# Altium PCB cy2018brush-driver_final.PcbDoc
Units mil, origin at the board's own origin, x right, y up, seen from the top; angles counter-clockwise.
Board outline 1980.48 x 1695.03 mil, 2 copper layers (Top Layer, Bottom Layer); 93 components, 101 nets, 336 pads, 123 vias.
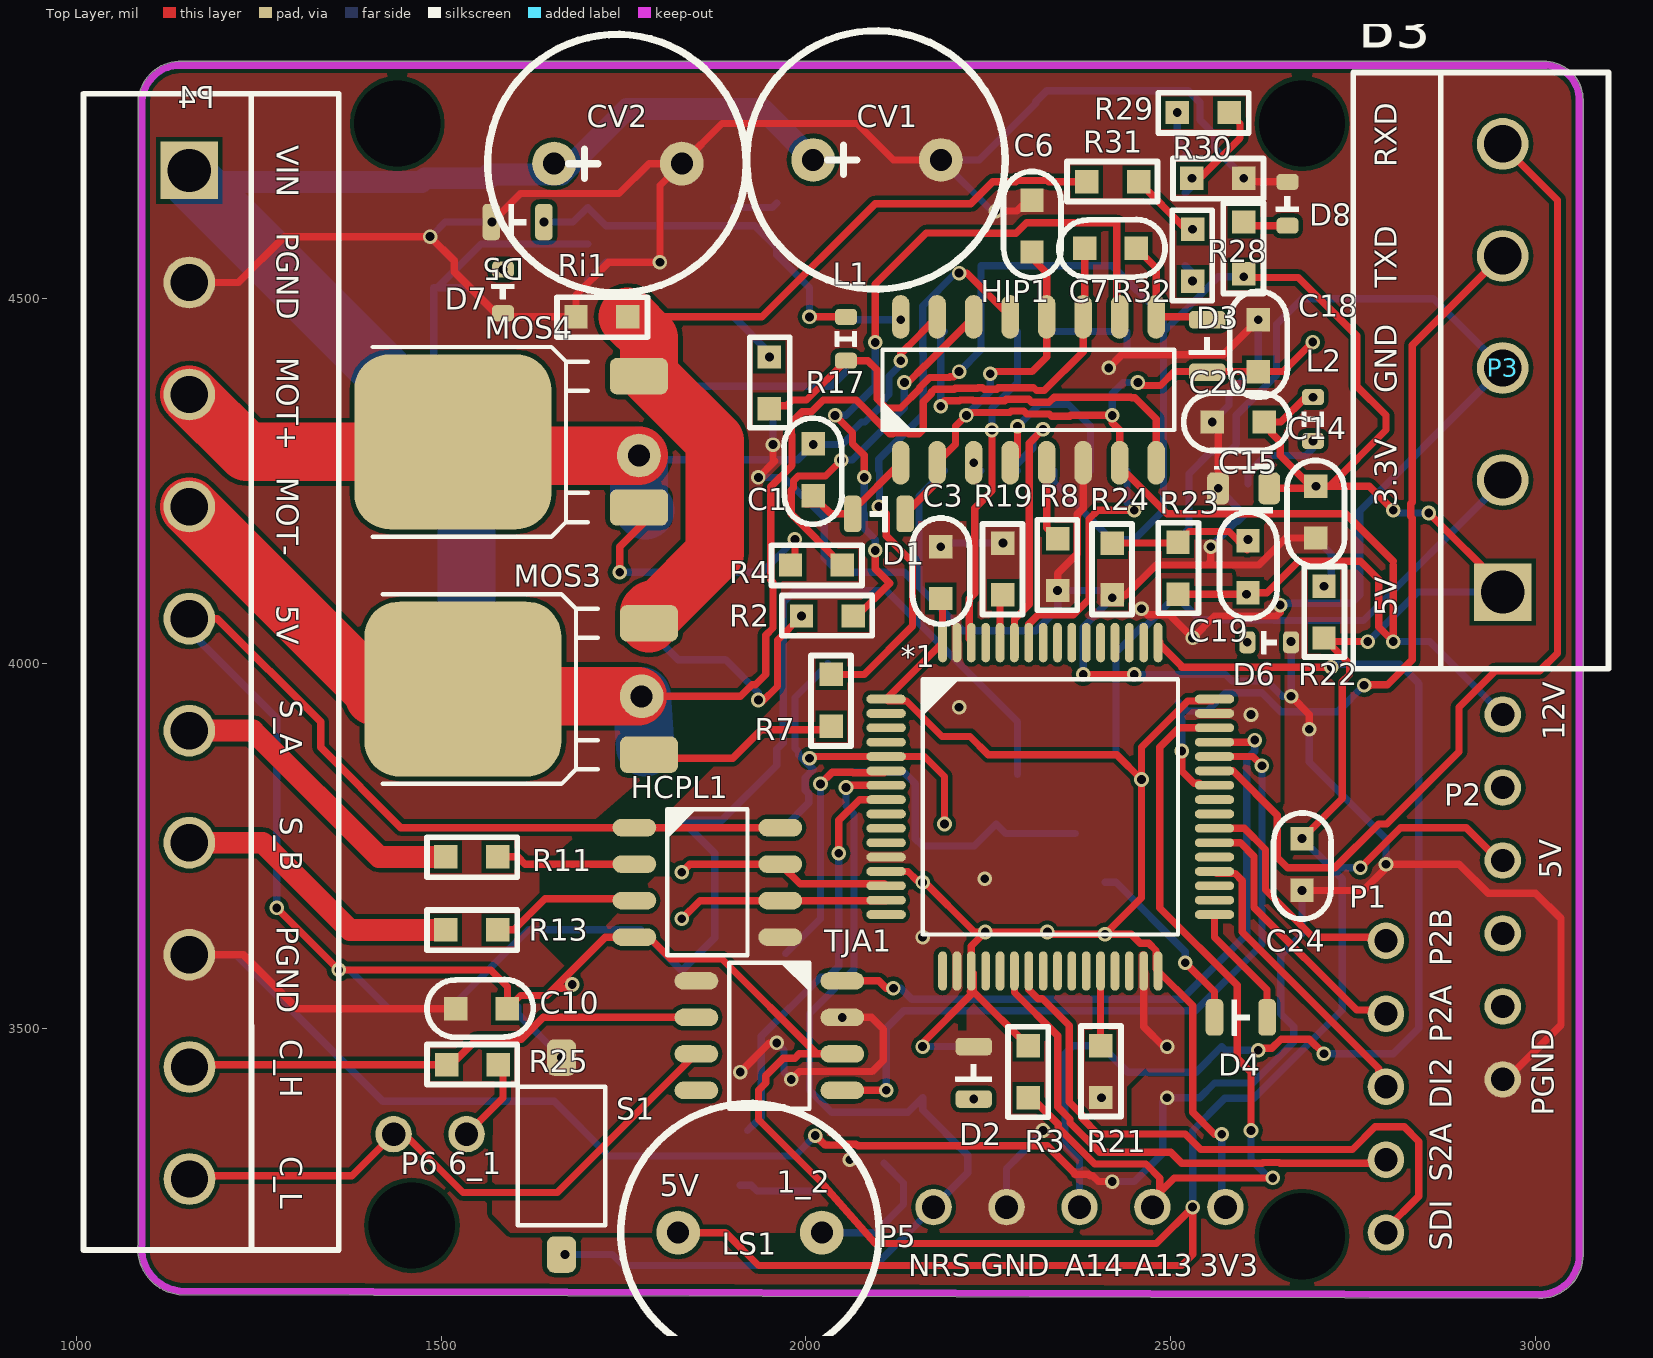
[diagram p0: Top Layer view]
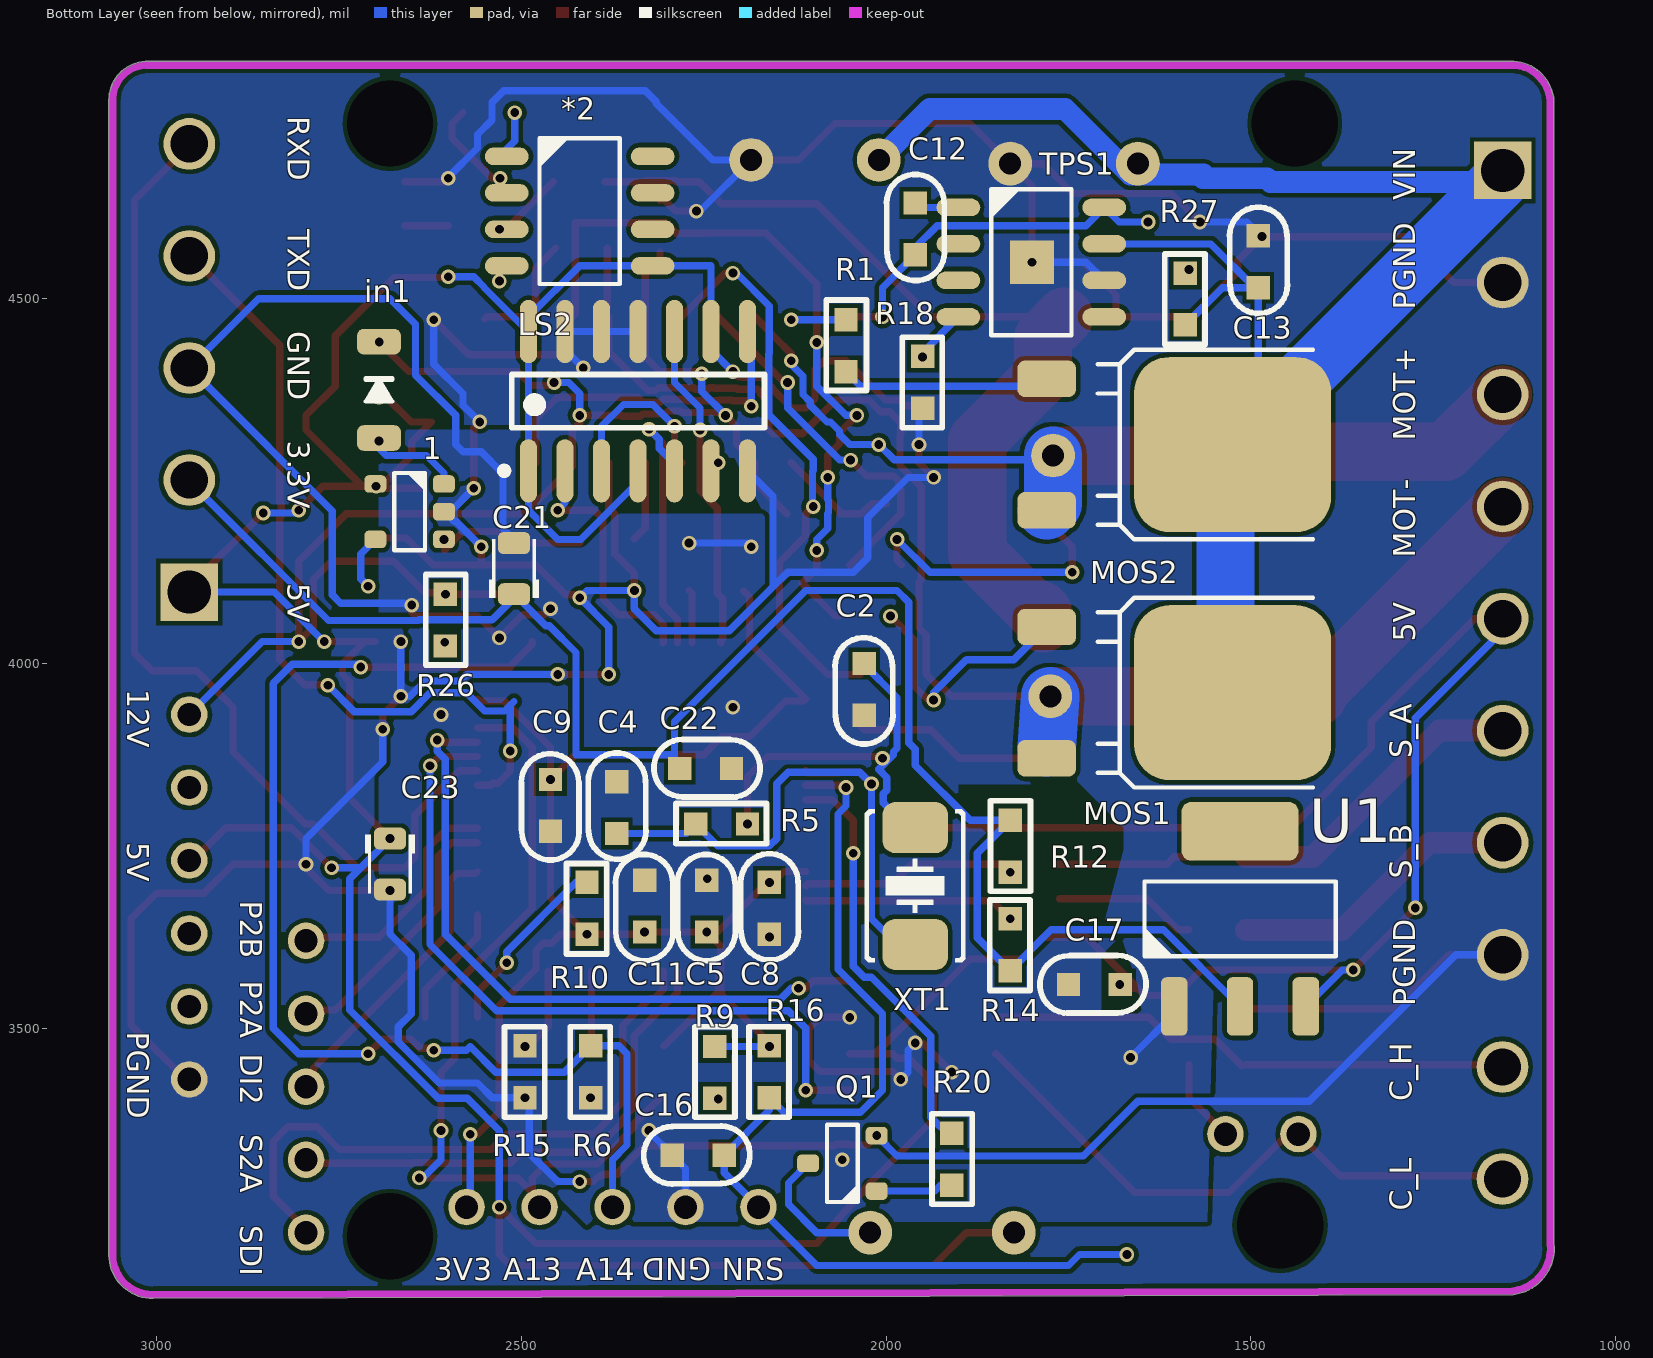
[diagram p1: Bottom Layer view, seen from below]
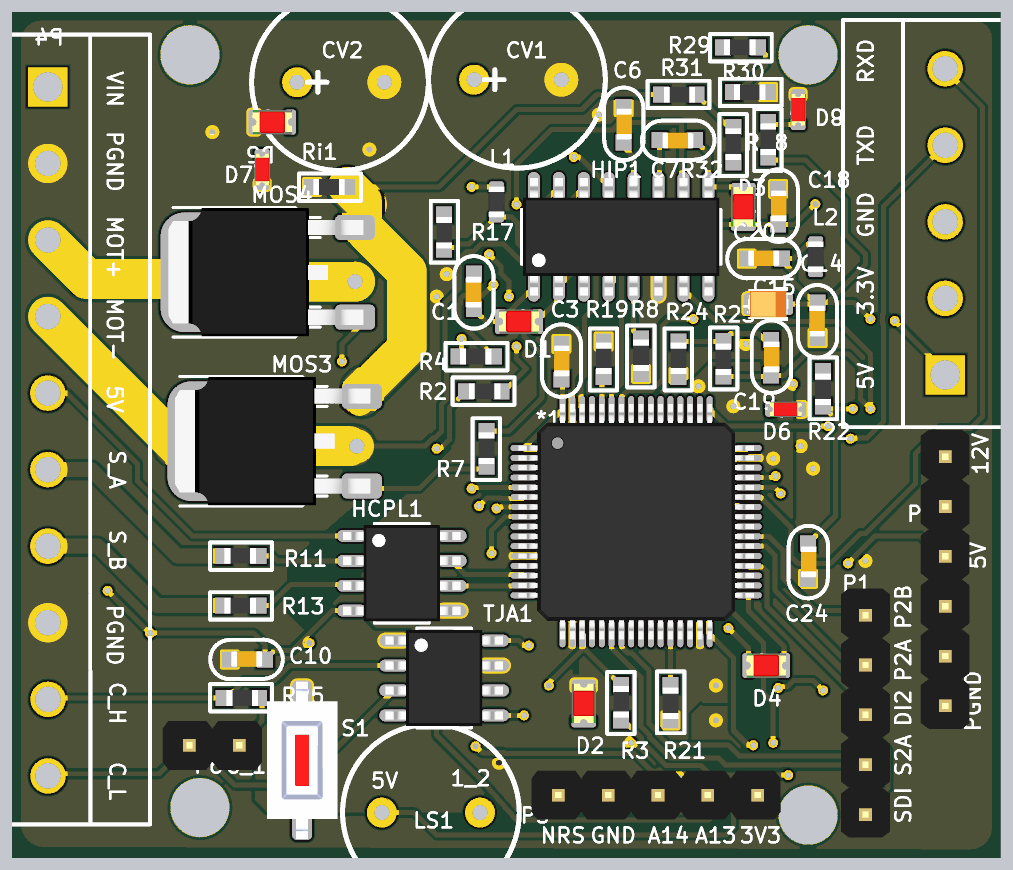
[diagram p2: 3D render of the assembled board from above, using the file's embedded part models]
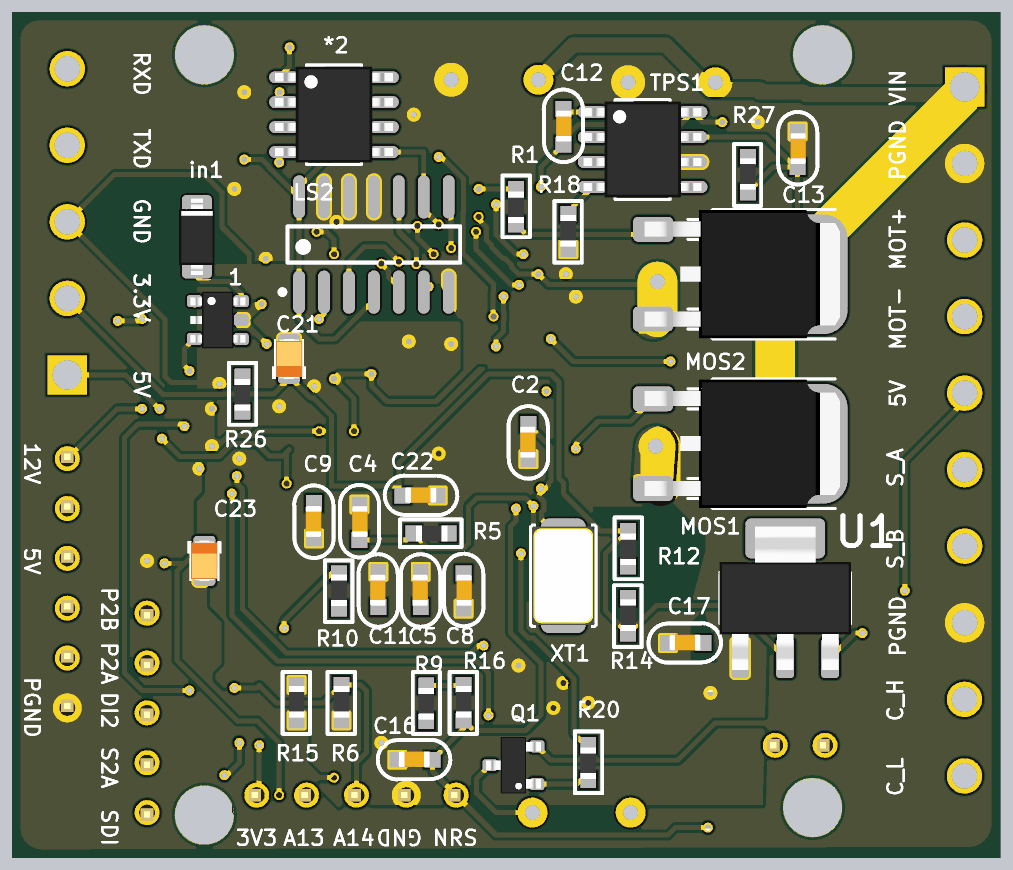
[diagram p3: 3D render of the assembled board from below, using the file's embedded part models]

## Layer stack, top to bottom
Top Solder: solder mask 0.4, Solder Resist, Dk 3.5
Top Layer: signal copper 1.4
Dielectric 1: dielectric 12.6, FR-4, Dk 4.8
Bottom Layer: signal copper 1.4
Bottom Solder: solder mask 0.4, Solder Resist, Dk 3.5

## Board outline
1084.98,3205.17 1084.98,4764.88 cw(c1142.5,4767.5) 1084.98,4770.12 1084.98,4775 cw(c1090,4775) 1085.86,4777.83 cw(c1142.5,4767.5) 1139.76,4825.01 cw(c1140,4820) 1140,4825.02 3015,4825.02 cw(c3015,4820) 3015.26,4825.01 cw(c3012.5,4772.5) 3065.08,4772.5 cw(c3012.5,4772.5) 3065.01,4769.87 3065.01,3189.33 cw(c3060,3189.33) 3065.01,3189.3 cw(c3005.34,3189.66) 3004.97,3129.99 cw(c3005,3135) 3004.96,3129.99 3004.99,3129.99 3004.96,3129.99 1141.18,3135.06 cw(c1141.2,3140.07) 1140.61,3135.09 cw(c1148,3198.08)

## Design rules (kind name [scope] priority, off if disabled: settings)
Clearance [All] p1: gap=6 ignorepadtopadclearanceinfootprint=TRUE
PolygonConnect [All] p1: connectstyle=Direct reliefconductorwidth=10 reliefentries=4 polygonreliefangle="90 Angle" airgapwidth=10
RoutingVias [All] p1: holewidth=28 width=50 viastyle="Through Hole" minholewidth=28 minwidth=50 maxholewidth=28 maxwidth=50
SilkToSilkClearance [All] p1 off: silktosilkclearance=10
SolderMaskExpansion [All] p1: expansion=4
Width [All] p1: maxlimit=100 minlimit=10 preferedwidth=10 minimp=50.000000 maximp=50.000000 favimp=50.000000
29 further rules are at their usual default settings.

## Classes and differential pairs
component class Sheet1: 1 *1 C1 C2 C3 C4 C5 C6 C7 C8 C9 C10 C11 C12 C13 C14 C15 C16 C17 C18 C19 C20 C21 C22 C23 C24 CV1 CV2 D1 D2 D3 D4 D5 D6 D7 D8 HCPL1 HIP1 in1 L1 L2 LS1 LS2 MOS1 MOS2 MOS3 MOS4 P1 P2 P3 P4 P5 P6 Q1 R1 R2 R3 R4 R5 R6 R7 R8 R9 R10 R11 R12 R13 R14 R15 R16 R17 R18 R19 R20 R21 R22 R23 R24 R25 R26 R27 R28 Ri1 S1 TJA1 TPS1 U1 XT1
component class 放大电路: *2 R29 R30 R31 R32

## Components (designator, comment, footprint, x,y, rotation, side; value= is the part's Value field where it differs from the comment)
1 "LM27313" SOT23-5 2653,4208 r0 bottom
*1 "STM32F103RC" LQFP_P0.5_64 2335,3803.58 r0 top
*2 "LM358ad" SOP_E150_8#1 2420,4620 r180 bottom
C1 "Cap_0603" CAP_0603#1 2011,4263 r90 top value=1uF
C2 "Cap_0603" CAP_0603#1 2029,3962 r90 bottom value=20pF
C3 "Cap_0603" CAP_0603#1 2184,4127 r270 top value=0.1uF
C4 "Cap_0603" CAP_0603#1 2370,3805 r270 bottom value=20pF
C5 "Cap_0603" CAP_0603#1 2245,3665 r90 bottom value=0.1uF
C6 "Cap_0603" CAP_0603#1 2309,4602 r270 top value=0.1uF
C7 "Cap_0603" CAP_0603#1 2420,4570 r180 top value=1uF
C8 "Cap_0603" CAP_0603#1 2161,3667 r270 bottom value=0.1uF
C9 "Cap_0603" CAP_0603#1 2459,3803 r90 bottom value=0.1uF
C10 "Cap_0603" CAP_0603#1 1553,3526 r0 top value=0.1uF
C11 "Cap_0603" CAP_0603#1 2330,3665 r90 bottom value=0.1uF
C12 "Cap_0603" CAP_0603#1 1961,4598 r270 bottom value=0.1uF
C13 "Cap_0603" CAP_0603#1 1491,4553 r270 bottom value=10uF
C14 "Cap_0603" CAP_0603#1 2700,4205 r90 top value=0.1uF
C15 "Cap_Tan_0805" CAP_TAN_P0805 2600,4240 r180 top value=220uF
C16 "Cap_0603" CAP_0603#1 2260,3325 r180 bottom value=01uF
C17 "Cap_0603" CAP_0603#1 1717,3559 r180 bottom value=0.1uF
C18 "Cap_0603" CAP_0603#1 2619,4438 r270 top value=4.7uF
C19 "Cap_0603" CAP_0603#1 2605,4135 r270 top value=220pF
C20 "Cap_0603" CAP_0603#1 2590,4330 r0 top value=2.2uF
C21 "Cap_Tan_0805" CAP_TAN_P0805 2510,4130 r90 bottom value=100uF
C22 "Cap_0603" CAP_0603#2 2245,3855 r0 bottom value=0.1uF
C23 "Cap_Tan_0805" CAP_TAN_P0805 2680,3725 r270 bottom value=100uF
C24 "Cap_0603" CAP_0603#2 2679,3722 r90 top value=0.1uF
CV1 "680uF" 电解电容器 2185,4690 r180 top value=*μF
CV2 "680uF" 电解电容器 1830,4685 r180 top value=*μF
D1 "Din5819" LED_0805_RED 2100,4205 r180 top
D2 "LED_0805" LED_0805_RED 2230,3439 r90 top
D3 "Din5819" LED_0805_RED 2550,4435 r90 top
D4 "LED_0805" LED_0805_RED 2596,3515 r0 top
D5 "Diode" LED_0805_RED 1605,4605 r0 top
D6 "LED_0603" LED_0603_RED 2635,4029 r0 top
D7 "LED_0603" LED_0603_RED 1585,4510 r270 top
D8 "LED_0603" LED_0603_RED 2660,4630 r90 top
HCPL1 "HCPL0630" SOP_E150_8#1 1865,3700 r0 top
HIP1 "hip4082" SOP_E150_16 2305,4375 r90 top
in1 "SchottkyDiode_SOD123" SOD-123 2695,4375 r90 bottom value=B?
L1 "Ind_0603" IND_0603 2055,4445 r270 top value=47H
L2 "Ind_0603" IND_0603 2695,4335 r270 top value=10uH
LS1 "Bell" Bell-5.6-0.6-9mm 1923.43,3220 r0 top
LS2 "74LS08" SOP14 2338,4357.53 r90 bottom
MOS1 "MOSFET_N" TO-252AA 1780,4050 r270 bottom value=NMOS?
MOS2 "MOSFET_N" TO-252AA 1780,4390 r270 bottom value=NMOS?
MOS3 "MOSFET_N" TO-252AA 1785,3875 r90 top value=NMOS?
MOS4 "MOSFET_N" TO-252AA 1771.25,4213.75 r90 top value=NMOS?
P1 "HDR1x5_2.54" HDR1X5_2.54_180 2795,3220 r180 top
P2 "HDR1x6_2.54" HDR1X6_2.54_180 2955,3930 r180 top
P3 "HDR1x5_2.54" Green_5P 3050,4172.91 r90 top
P4 "Header 10" Green_10P 1155,4668.54 r270 top
P5 "HDR1x5_2.54" HDR1X5_2.54_180 2575,3255 r270 top
P6 "HDR1x2_2.54" HDR1X2_2.54_180 1535,3355 r270 top
Q1 "BJT_NPN" SOT23-3 2060,3315 r0 bottom
R1 "Res_0603" RES_0603 1973,4434 r270 bottom value=10K
R2 "Res_0603" RES_0603 2031,4147 r0 top value=10K
R3 "Res_0603" RES_0603 2223,3442 r90 top value=10K
R4 "Res_0603" RES_0603 2013,4053 r180 top value=10K
R5 "Res_0603" RES_0603 2224,3862 r180 bottom value=1M
R6 "Res_0603" RES_0603 2487,3442 r90 bottom value=10K
R7 "Res_0603" RES_0603 1953,3951 r90 top value=10K
R8 "Res_0603" RES_0603 2263,4137 r90 top value=10K
R9 "Res_0603" RES_0603 2153,3438 r270 bottom value=10K
R10 "Res_0603" RES_0603 2492,3666 r90 bottom value=10K
R11 "Res_0603" RES_0603 1540.63,3653 r180 top value=500
R12 "Res_0603" RES_0603 1748,3748 r270 bottom value=2k
R13 "Res_0603" RES_0603 1540.63,3553 r180 top value=500
R14 "Res_0603" RES_0603 1912,3616 r90 bottom value=2k
R15 "Res_0603" RES_0603 2577,3442 r90 bottom value=0
R16 "Res_0603" RES_0603 2242,3442 r90 bottom value=10K
R17 "Res_0603" RES_0603 2032,4383 r270 top value=10K
R18 "Res_0603" RES_0603 2032,4387 r90 bottom value=3.3K
R19 "Res_0603" RES_0603 2188,4131 r90 top value=10K
R20 "Res_0603" RES_0603 1828,3319 r270 bottom value=1K
R21 "Res_0603" RES_0603 2485.9,3439.1 r270 top value=10K
R22 "Res_0603" RES_0603 2792,4069 r270 top value=10K
R23 "Res_0603" RES_0603 2592,4129 r270 top value=10K
R24 "Res_0603" RES_0603 2338,4131 r90 top value=1K
R25 "Res_0603" RES_0603 1544.63,3532 r0 top value=120
R26 "Res_0603" RES_0603 2522,4058 r270 bottom value=10K
R27 "Res_0603" RES_0603 1672,4501 r90 bottom value=10K
R28 "Res_0603" RES_0603 2518,4571 r90 top value=10K
R29 "Res_0603" RES_0603 2543,4673 r180 top value=500K
R30 "Res_0603" RES_0603 2563,4583 r180 top value=10K
R31 "Res_0603" RES_0603 2422,4742 r0 top value=10K
R32 "Res_0603" RES_0603 2448,4561 r90 top value=500K
Ri1 "Res_0603" RES_0603 1719,4393 r180 top value=0.001
S1 "ButtonTACT_3x6x2.5_180" ButtonTACT_3x6x2.5_180 1665,3325 r90 top
TJA1 "TJA1050" SOP_E150_8#2 1950,3490 r180 top
TPS1 "TPS5430" SOP_E150_9 1800,4551 r180 bottom
U1 "tlv1117-3.3" SOT223-3 1515,3650 r180 bottom
XT1 "XTAL_32.768kHz" XT_5032_2 1960,3695 r90 bottom value=8M

## Footprints (in the part's own frame and the unit in brackets; to place one, negate y for a bottom-side part, rotate by r counter-clockwise, add the part's x,y. Pads: shape width x height; smd on the part's side, far side on the other; paste and mask are expansions set on the pad)
Bell-5.6-0.6-9mm [mil]
  round 60 hole 30: 1(-98.43,0) 2(98.43,0)
  silkscreen extent -177,-177 177,177
ButtonTACT_3x6x2.5_180 [mil]
  rrect50% 50x40 smd: 1(-135,0) 2(135,0)
  silkscreen extent -95,-60 95,60, body extent -157,-71 157,71, height 94
CAP_0603#1 [mil]
  rect 32x32 smd: 1(-33,1) 2(38,1)
  silkscreen extent -72,-38 73,41, body extent -30,-14 33,18, height 31
CAP_0603#2 [mil]
  rect 32x32 smd: 1(-33,-1) 2(38,-1)
  silkscreen extent -72,-41 73,38, body extent -30,-18 33,14, height 31
CAP_TAN_P0805 [mil]
  rrect50% 30x44 smd: 1(-35,0) 2(35,0)
  silkscreen extent -40,-34 40,34, body extent -40,-27 40,27, height 59
Green_5P [mm]
  rect 2x2 hole 1.5: 1(-1.905,2.413)
  round 1.8 hole 1.3: 2(1.995,2.413) 3(5.895,2.413) 4(9.795,2.413) 5(13.695,2.413)
  silkscreen extent -4.57,-1.27 16.18,7.62
Green_10P [mm]
  rect 2x2 hole 1.5: 1(-0.18,0)
  round 1.8 hole 1.3: 2(3.72,0) 3(7.62,0) 4(11.52,0) 5(15.42,0) 6(19.32,0) 7(23.22,0) 8(27.12,0) 9(31.025,0.01) 10(34.925,0.01)
  silkscreen extent -2.85,-3.68 37.39,5.21
HDR1X2_2.54_180 [mil]
  round 50 hole 32: 1(0,0) 2(0,-100)
  body extent -49,-150 49,50, height 323
HDR1X5_2.54_180 [mil]
  round 50 hole 32: 1(0,0) 2(0,-100) 3(0,-200) 4(0,-300) 5(0,-400)
  body extent -49,-450 49,50, height 323
HDR1X6_2.54_180 [mil]
  round 50 hole 32: 1(0,0) 2(0,100) 3(0,200) 4(0,300) 5(0,400) 6(0,500)
  body extent -49,-58 49,542, height 323
IND_0603 [mil]
  rrect50% 22x30 smd: 1(-30,0) 2(30,0)
  silkscreen extent -10,-15 10,15, body extent -31,-16 31,16, height 31
LED_0603_RED [mil]
  rrect50% 22x30 smd: 1(-30,0) 2(30,0)
  silkscreen extent -10,-16 10,16, body extent -32,-16 32,16, height 24
LED_0805_RED [mil]
  rrect50% 24x50 smd: 1(-36,0) 2(36,0)
  silkscreen extent -12,-24 12,24, body extent -40,-25 40,25, height 43
LQFP_P0.5_64 [mil]
  oval 54x12 smd: 1(-225,147.64) 2(-225,127.95) 3(-225,108.27) 4(-225,88.58) 5(-225,68.9) 6(-225,49.21) 7(-225,29.53) 8(-225,9.84) 9(-225,-9.84) 10(-225,-29.53) 11(-225,-49.21) 12(-225,-68.9) 13(-225,-88.58) 14(-225,-108.27) 15(-225,-127.95) 16(-225,-147.64) 33(225,-147.64) 34(225,-127.95) 35(225,-108.27) 36(225,-88.58) 37(225,-68.9) 38(225,-49.21) 39(225,-29.53) 40(225,-9.84) 41(225,9.84) 42(225,29.53) 43(225,49.21) 44(225,68.9) 45(225,88.58) 46(225,108.27) 47(225,127.95) 48(225,147.64)
  oval 12x54 smd: 17(-147.64,-225) 18(-127.95,-225) 19(-108.27,-225) 20(-88.58,-225) 21(-68.9,-225) 22(-49.21,-225) 23(-29.53,-225) 24(-9.84,-225) 25(9.84,-225) 26(29.53,-225) 27(49.21,-225) 28(68.9,-225) 29(88.58,-225) 30(108.27,-225) 31(127.95,-225) 32(147.64,-225) 49(147.64,225) 50(127.95,225) 51(108.27,225) 52(88.58,225) 53(68.9,225) 54(49.21,225) 55(29.53,225) 56(9.84,225) 57(-9.84,225) 58(-29.53,225) 59(-49.21,225) 60(-68.9,225) 61(-88.58,225) 62(-108.27,225) 63(-127.95,225) 64(-147.64,225)
  silkscreen extent -175,-175 175,175, body extent -236,-236 236,236, height 59
RES_0603 [mil]
  rect 32x32 smd: 1(-37,-82) 2(34,-82)
  silkscreen extent -64,-109 60,-54, body extent -31,-98 31,-66, height 18
SOD-123 [mil]
  rrect50% 35x60 smd: 1(-66,0) 2(66,0)
  silkscreen extent -16,-18 16,18, body extent -77,-35 77,35, height 46
SOP14 [mm]
  oval 2.2x0.6 smd: 1(-2.374,3.861) 2(-2.374,2.591) 3(-2.374,1.321) 4(-2.374,0.051) 5(-2.374,-1.219) 6(-2.374,-2.489) 7(-2.374,-3.759) 8(2.476,-3.759) 9(2.476,-2.489) 10(2.476,-1.219) 11(2.476,0.051) 12(2.476,1.321) 13(2.476,2.591) 14(2.476,3.861)
  silkscreen extent -2.5,-4.35 0.98,4.84, body extent -1.95,-4.35 2.05,4.45, height 1.7
SOP_E150_8#1 [mil]
  oval 60x24 smd: 1(-100,75) 2(-100,25) 3(-100,-25) 4(-100,-75) 5(100,-75) 6(100,-25) 7(100,25) 8(100,75)
  silkscreen extent -55,-100 55,100, body extent -118,-96 118,96, height 69
SOP_E150_8#2 [mil]
  oval 60x24 smd: 1(-100,-75) 2(-100,-25) 3(-100,25) 4(-100,75) 5(100,75) 6(100,25) 7(100,-25) 8(100,-75)
  silkscreen extent -55,-100 55,100, body extent -118,-96 118,96, height 69
SOP_E150_9 [mil]
  oval 60x24 smd: 1(-101,74) 2(-101,24) 3(-101,-26) 4(-101,-76) 5(99,-76) 6(99,-26) 7(99,24) 8(99,74)
  rect 60x60 smd: 9(0,-1)
  silkscreen extent -56,-101 54,99, body extent -119,-97 117,95, height 69
SOP_E150_16 [mil]
  oval 60x24 smd: 1(-100,175) 2(-100,125) 3(-100,75) 4(-100,25) 5(-100,-25) 6(-100,-75) 7(-100,-125) 8(-100,-175) 9(100,-175) 10(100,-125) 11(100,-75) 12(100,-25) 13(100,25) 14(100,75) 15(100,125) 16(100,175)
  silkscreen extent -55,-200 55,200, body extent -118,-197 118,197, height 69
SOT23-3 [mil]
  rrect50% 30x24 smd: 1(-47,38) 2(-47,-38) 3(47,0)
  silkscreen extent -21,-53 21,53, body extent -55,-57 55,57, height 51
SOT23-5 [mil]
  rrect50% 30x24 smd: 1(-47,-38) 2(-47,0) 3(-47,38) 4(47,38) 5(47,-38)
  silkscreen extent -21,-53 21,53, body extent -55,-57 55,57, height 57
SOT223-3 [mil]
  rrect40% 36x80 smd: 1(-90.16,-120) 2(0,-120) 3(90.16,-120)
  rrect30% 160x80 smd: 4(0,120)
  silkscreen extent -131,-51 131,51, body extent -132,-144 132,144, height 71
TO-252AA [mil]
  rrect40% 50x80 smd: 1(0,0) 3(180,0)
  rrect40% 240x270 smd: 4(90,255)
  silkscreen extent -40,70 220,365, body extent -39,-17 219,374, height 91
XT_5032_2 [mil]
  rrect50% 70x90 smd: 1(-80,0) 2(80,0)
  silkscreen extent -104,-68 104,68, body extent -98,-63 98,63, height 39
电解电容器 [mil]
  round 60 hole 30: 1(175,0) 2(0,0)
  silkscreen extent -88,-177 266,177

## Part data
*1: "MCU"
C1 C2 C3 C4 C5 C6 C7 C8 C9 C10 C11 C12 C13 C14 C15 C16 C17 C18 C19 C20 C21 C22 C23 C24: "Capacitor"
CV1 CV2: library part CAP-ELE, "电解电容", LatestRevisionDate=17-Jul-2002, LatestRevisionNote="Re-released for DXP Platform.", PackageDescription="Polarized Capacitor (Radial); 2 Leads", PackageReference=RB7.6-15, Published=8-Jun-2000, Publisher="Altium Limited"
D1 D3: library part Diode, "Diode"
D2 D4 D6 D7 D8: "LED"
in1: "Diode"
L1 L2: "Inductor"
LS1: "Electrical Bell", LatestRevisionDate=17-Jul-2002, LatestRevisionNote="Re-released for DXP Platform.", PackageReference=PIN2, Published=24-Mar-1999, Publisher="Altium Limited"
MOS1 MOS2 MOS3 MOS4: "MOSFET"
P1 P2 P3 P5 P6: "Header"
P4: "Header, 10-Pin", LatestRevisionDate=17-Jul-2002, LatestRevisionNote="Re-released for DXP Platform.", Publisher="Altium Limited"
Q1: "Transistor"
R1 R2 R3 R4 R5 R6 R7 R8 R9 R10 R11 R12 R13 R14 R15 R16 R17 R18 R19 R20 R21 R22 R23 R24 R25 R26 R27 R28 R29 R30 R31 R32 Ri1: "Resistor"
S1: "Button"
TJA1: "CAN总线收发器"
U1: library part LM1117IMP-5.0, "800mA Low-Dropout Linear Regulator", DigiKeyPartNumber=LM1117IMP-5.0CT-ND, Manufacturer="National Semiconductor", PackageTopMarking=XYTT*N06B, PowerWise=N, Code_IPC=SOT223-4, Code_JEDEC=TO-261-AA, ComponentLink1Description="LM1117 Datasheet", ComponentLink1URL=http://www.national.com/ds/LM/LM1117.pdf, ComponentLink2Description="LM1117 Web Page", ComponentLink2URL=http://www.national.com/pf/LM/LM1117.html, ComponentLink3Description="MP04A Package Page", ComponentLink3URL=http://www.national.com/packaging/folders/mp04a.html, CompType="LDO IC", DatasheetVersion=Apr-2006, PackageDescription="Molded SOT-223, 6.50 x 3.56 x 1.6mm Body, 4 Lead, 2.3mm Pitch", PackageReference=MP04A, PackageVersion="revB, Apr-2003", PartNumber=LM1117IMP-5.0, PinCount=4, Published=4-Dec-2008, Publisher="Altium Limited", RoHS=O
XT1: library part XTAL_32.768k, "Crystal Oscillator"

## Free pads (board coordinates)
  round 30 hole 118.11: 1(1460,3230) 2(2680,3215) 3(2680,4740) 4(1440,4740)
  round 60 hole 30: 6(1775,3955) 7(1771.25,4285)

## Via types
v1: diameter 20, hole 12, Top Layer to Bottom Layer, 123 vias

## Nets (pads, with @x,y where several pads share a name; then routed paths per layer and width w, separated by ;. In a path a pad name is that pad's centre, name@x,y a point inside that pad or via, vN(x,y) a via of type N, cw(c..) or ccw(c..) an arc to the next point about the centre after c; other vN are vias at no path point)
3.3V: C21.1 C22.2 P3.2 R12.1 R14.1 U1.2 | length 2418.5
  Bottom Layer w10: U1.2 1620,3635 1774,3635 R14.1 1875,3624 1875,3740 R12.1 1884.7,3785 1960,3860.3 1960,3882.37 1969,3891.37 1969,4084 1985,4100 2110,4100 2290,3920 2290,3875 ; C22.2@2290,3848 2290,3875 ; P3.2@2955,4240 2945.3,4240 2764.3,4059 2641.3,4059 2640.3,4060 2540,4060 2505,4095 2505,4090.3 2466.35,4051.65 2461.65,4051.65 2425,4015 2425,3875 2290,3875
3V3: *1.1 *1.13 *1.19 *1.32 *1.48 *1.64 C3.2 C5.1 C8.1 C9.2 C11.1 P5.1 R3.2 R9.1 R10.1 R16.2 | length 2200.7
  Top Layer w10: *1.13 2140,3715 2152,3703 v1@2160,3703 ; v1(2160,3475) 2160,3480 2226.73,3546.73 *1.19 ; v1(2160,3700) v1@2160,3703 ; C3.2@2195,4099 2187.36,4091.36 *1.64 *1.1 2112.68,3948.54 2138.04,3948.54 2186.58,3900 2225,3900 2250,3875 2426,3875 v1(2460,3841) ; R3.2 2303.96,3476 2229.42,3550.54 2229.42,3575.9 *1.19 ; *1.48 2557.31,3948.54 2523.54,3948.54 2460,3885 v1(2460,3841) ; v1(2570,3355) 2560,3355 2530,3385 2530,3531.22 *1.32 2479.95,3581.27 2479.95,3606.62 2469.99,3616.58 2458.42,3616.58 2446,3629 v1(2410,3629) ; v1@2160,3703 2231,3632 v1(2246,3632) ; *1.19 2226.73,3612.73 v1(2246,3632) ; v1(2246,3632) v1(2331,3632) 2334,3629 v1(2410,3629) ; v1(2410,3629) 2460,3679 v1(2460,3841)
  Bottom Layer w10: v1(2160,3475) R9.1 ; v1(2570,3355) 2570,3260 P5.1
5V: 1.5 *2.5 C10.2 C14.2 C15.1 C17.2 C20.2 C23.1 C24.2 HCPL1.1 HCPL1.4 HCPL1.8 L1.2 L2.1 LS1.1 LS2.1 LS2.4 LS2.9 LS2.14 P2.3 P3.1 P4.5 R17.2 R22.2 R28.1 TJA1.3 U1.3 | length 8048.3
  Top Layer w10: P4.5 1193.54,4061.46 1335,3920 1335,3885 1445,3775 HCPL1.1 HCPL1.8 ; v1(1275,3665) v1(1360,3580) 1568,3580 1591,3557 C10.2 1609,3545 1645,3545 1655,3555 ; v1(1680,3560) 1675,3555 1655,3555 ; LS1.1 1890,3220 1935,3175 2515,3175 2530,3190 v1(2530,3255) 2480,3205 2095,3205 2020,3290 1935,3375 1935,3415 1945,3425 1945,3435 1969,3459 1985,3459 1991,3465 2015,3465 ; R17.2@1950,4350 1953.37,4353.37 1974,4353.37 1981.63,4361 2001,4361 L1.2 2085,4415 2097.5,4402.5 2097.5,4362.5 2110,4350 2129.7,4350 2156,4376.3 2156,4378.33 2169.67,4392 2197.05,4392 2198.05,4393 2203,4393 v1(2210,4400) ; TJA1.3 2015,3465 ; R28.1@2600,4529 2674.93,4529 2755,4448.93 2755,4380 2795,4340 2795,4320 2718,4243 ; C20.2@2623,4331 2650,4304 2650,4285 2692,4243 v1(2699,4243) 2718,4243 ; C20.2 2651,4331 2685,4365 v1(2695,4365) ; C15.1 C14.2@2695,4240 ; v1(2680,3760) 2735,3815 2735,3975 2745,3985 2745,3999.7 R22.2@2714.7,4030 ; R22.2@2700,4030 v1(2770,4030) ; v1(2760,3720) 2815,3775 2905,3775 P2.3@2955,3725 ; v1(2805,4210) 2772,4243 2718,4243 ; v1(2853.75,4206.25) 2955,4105 P3.1 ; 1655,3555 1725,3625 HCPL1.4 1785,3625 1815,3595 1885,3595 2015,3465
  Bottom Layer w10: P4.5 1155,4045 1275,3925 v1(1275,3665) ; v1(1360,3580) 1374.84,3580 U1.3 ; v1(2210,4400) 2240,4430 LS2.9 2240,4545 *2.5 2420,4545 2490,4475 LS2.14 ; LS2.4 2340,4248.68 2418.68,4170 2450,4170 2490,4210 LS2.1 LS2.14 ; v1(2530,3255) 2530,3360 2574,3404 2614,3404 2735,3525 2735,3705 2720,3720 ; v1(2600,4530) 2565,4530 2551,4516 2551,4515.3 2490.7,4455 LS2.14 ; v1(2680,3760) 2720,3720 ; v1(2760,3720) 2720,3720 ; v1(2770,4030) 2770.6,4030 2838.52,4097.91 P3.1 ; v1(2805,4210) 2808.75,4206.25 v1(2853.75,4206.25) v1@2855,4205
12V: C6.2 C18.2 C19.2 D1.1 D3.1 HIP1.2 HIP1.7 HIP1.12 in1.2 P2.1 R23.2 R26.1 | length 2221.1
  Top Layer w10: D1.1 2180,4249 HIP1.2 2180,4275.53 2205,4300.53 2205,4325 2224,4344 2279.3,4344 2281.3,4346 2298.7,4346 2302.7,4342 2333.7,4342 2336.7,4339 2361.63,4339 2362.63,4340 v1(2420,4340) 2420,4330 2430,4320 HIP1.7 2430,4270 2495,4205 2740,4205 2805,4140 ; v1(2252.83,4397) 2252.83,4397.83 2255,4400 2310,4400 2330,4420 HIP1.12 2330,4535 2310,4555 C6.2 ; v1(2455,4385) 2455,4382 2456,4381 2486,4381 2505,4400 2654,4400 v1(2694.5,4440.5) ; R23.2 v1(2604,4095) C19.2 2632,4097 2675,4140 2760,4140 2785,4115 2785,4050 v1(2805,4030) 2805,4135
  Bottom Layer w10: v1(2220,4340) 2252.83,4372.83 v1(2252.83,4397) ; v1(2420,4340) 2420,4370 2435,4385 v1(2455,4385) ; v1(2805,4030) 2855,4030 P2.1
BOOT0: *1.60 R19.1 | length 73
  Top Layer w10: *1.60 2266.1,4096.1 R19.1@2270,4100
BOOT1: *1.28 R21.1 | length 104
  Top Layer w10: *1.28 R21.1 R21.1@2405,3475
CAN_H: P4.9 R25.1 TJA1.7 | length 718.4
  Top Layer w10: P4.9 1158.31,3450 R25.1 ; R25.1@1512.56,3448.56 1549,3485 1610,3485 1640,3515 TJA1.7
CAN_L: P4.10 P6.2 TJA1.6 | length 830.1
  Top Layer w10: P4.10@1155.41,3297.93 1377.93,3297.93 P6.2 1450,3355 1530,3275 1659.47,3275 1849.47,3465 TJA1.6
CAN_RX: *1.44 TJA1.4 | length 1022.8
  Top Layer w10: TJA1.4 v1(2110,3415) ; *1.44 2612.52,3872.48 v1(2625,3860)
  Bottom Layer w10: v1(2110,3415) 2110,3500 2134,3524 2534,3524 2625,3615 v1(2625,3860)
CAN_TX: *1.45 TJA1.1 | length 928
  Top Layer w10: TJA1.1 2100,3565 2110,3555 v1(2120,3555) ; *1.45 2612.17,3892.17 v1(2615,3895)
  Bottom Layer w10: v1(2120,3555) 2130,3555 2145,3540 2515,3540 2604,3629 2604,3868.7 2615,3879.7 v1(2615,3895)
DIS: *1.62 LS2.10 | length 454.8
  Top Layer w10: *1.62 2226.73,4031.27 2224.05,4033.95 2224.05,4088.75 2231.3,4096 2231.3,4212.84 2255,4236.54 v1(2255,4320)
  Bottom Layer w10: v1(2255,4320) 2255,4350 2290,4385 LS2.10
DIS2: *1.36 P1.3 | length 398.1
  Top Layer w10: *1.36 2562.68,3712.31 2588.04,3712.31 2598,3702.36 2598,3632 2785,3445 P1.3@2785,3425
DISIN: HIP1.8 LS2.8 | length 482.8
  Top Layer w10: v1(2185,4352.5) 2185,4355 2190,4360 2210.3,4360 2211.3,4361 2228.7,4361 2229.7,4360 2272.67,4360 2274.67,4362 2305.33,4362 2309.33,4358 2333.3,4358 2340.3,4365 2445.3,4365 2446.3,4364 2451,4364 2480,4335 HIP1.8
  Bottom Layer w10: v1(2185,4352.5) 2185,4450 LS2.8
GND: *1.12 *1.18 *1.31 *1.47 *1.63 C2.1 C3.1 C4.1 C5.2 C8.2 C9.1 C11.2 C16.1 C17.1 C21.2 C22.1 D2.2 HCPL1.5 P3.3 P5.4 R6.1 R15.2 R19.2 R21.2 S1.2 TJA1.2 TJA1.8 U1.1 | length 2247.7
  Top Layer w10: v1(1910,3440) 1950,3480 v1(1960,3480) ; v1(1980,3430) 1990.7,3440.7 2090.7,3440.7 2106,3456 2106,3499 2090,3515 v1(2050,3515) ; v1(2460,4075) 2468.42,4066.58 2498.42,4066.58 v1(2530,4035) 2560,4065 2645,4065 2650,4070 v1(2650,4080) ; *1.31 2462.95,3502.05 2490,3475 v1(2495,3475)
  Bottom Layer w10: U1.1 1605.16,3519.84 v1(1665,3460) ; v1(1960,3480) 1970,3470 1970,3440 v1(1980,3430) ; v1(2185,4160) 2190,4165 v1(2270,4165) ; P5.4 2275,3308 C16.1 2325,3358 v1(2325,3360) ; C21.2@2505,4165 2525,4185 2525,4260 2555,4290 2580,4290 2590,4300 2590,4340 2645,4395 2645,4465 2680,4500 2860,4500 P3.3 P3.3@2965,4395 ; v1(2650,4080) v1@2657.37,4080 ; 2660,4082.63 2747.63,4082.63 2759,4094 2759,4209 P3.3@2932.5,4382.5
  other v1: 2060,3320 2405,3405 2160,3625 2245,3705 2610,3930 2210,3940
LED1: *1.30
LED2: *1.29
MOT+: C1.2 HIP1.15 MOS2.3 MOS4.4 P4.3 pad.7 | length 1248.7
  Top Layer w10: v1(2130,4415) 2130,4424.47 2153,4447.47 2157.76,4452.24 2157.76,4452.76 HIP1.15
  Top Layer w80: P4.3 1233.54,4290 1575,4290 1580.25,4284.75 1771,4284.75 pad.7
  Bottom Layer w10: pad.7@1771.25,4279 1989,4279 v1(2010,4300) 2050,4300 2064,4314 2064,4318.7 2076.3,4331 2081,4331 2104,4354 2104,4358.7 2114,4368.7 2114,4393.7 2130,4409.7 v1(2130,4415)
  Bottom Layer w80: pad.7 1771.25,4218.75 MOS2.3
MOT-: C7.2 HIP1.11 MOS1.3 MOS3.4 P4.4 pad.6 | length 1982.2
  Top Layer w10: pad.6 1910.3,3955 1926.3,3971 1931,3971 1945,3985 1945,4038.63 1955,4048.63 1955,4111.44 1952,4114.44 1952,4242.18 1981,4271.18 1981,4313.7 1980,4314.7 1980,4330 1995,4345 2007.63,4345 2023.63,4361 2069,4361 2115.15,4314.85 2119.32,4314.85 2120.47,4316 2139.53,4316 2140.68,4314.85 2154.85,4314.85 2161,4321 2161,4358.67 2172,4369.67 2172,4371.7 2176.3,4376 2203.67,4376 2204.67,4377 2235.33,4377 2236.33,4378 2242.13,4378 2244.13,4376 2261.52,4376 2263.53,4378 2311.95,4378 2315.95,4374 2326.67,4374 2380,4427.33 HIP1.11 HIP1.11@2385,4475 ; HIP1.11@2382,4489 C7.2
  Top Layer w80: P4.4 1408.72,3961.28 1408.72,3955 pad.6@1770,3955
  Bottom Layer w80: pad.6 MOS1.3@1780,3885
Net1_1: 1.1 in1.1 L2.2 | length 128.1
  Bottom Layer w10: 1.1 2606,4261 2630,4285 2685,4285 2695,4295 v1(2695,4305)
Net1_3: 1.3 C19.1 R23.1 R24.2 | length 202
  Top Layer w10: R24.2 2509,4165 R23.1 2525,4181 2580,4181 C19.1@2605,4156
  other v1: 2606,4170
Net1_4: 1.4 R22.1 | length 76.4
  Bottom Layer w10: 1.4 2720,4150 2720,4116 v1(2710,4106)
Net*2_1: *2.1 R29.2 | length 68.7
  Bottom Layer w10: v1(2509,4755) 2509,4716 2525,4700 *2.1
Net*2_2: *2.2 R29.1 R30.2 | length 153.7
  Top Layer w10: v1(2529,4665) 2540,4665 2595,4720 2595,4740 R29.1
  Bottom Layer w10: *2.2 2529,4654 v1(2529,4665)
Net*2_3: *2.3 R31.2 R32.2 | length 100.9
  Top Layer w10: R31.2 2521,4595 v1(2530,4595)
Net*2_4: *2.4 R32.1 | length 25.1
  Bottom Layer w10: *2.4 2530,4535 v1(2530,4524)
NetC1_1: C1.1 D1.2 HIP1.1 | length 167.1
  Top Layer w10: C1.1@2000,4219 2020,4219 2034,4205 D1.2 2064,4209 HIP1.1
NetC7_1: C7.1 D3.2 HIP1.9 | length 176.4
  Top Layer w10: C7.1 2480,4542 HIP1.9 2547,4475 D3.2@2550,4472
NetC12_1: C12.1 TPS1.1 | length 61.5
  Bottom Layer w10: TPS1.1 1954,4625 C12.1
NetC12_2: C12.2 D5.2 L1.1 TPS1.8 | length 512.7
  Top Layer w10: v1(2005,4475) L1.1
  Bottom Layer w10: v1@1642,4605 1681,4605 TPS1.8 1726,4600 1930,4600 1960,4570 C12.2 2005,4515 v1(2005,4475)
  other v1: 1641,4605
NetD2_1: D2.1 R9.2
  other v1: 2230,3403
NetD4_1: D4.1 R10.2 | length 255.9
  Top Layer w10: v1(2520,3590) 2560,3550 D4.1
  Bottom Layer w10: R10.2 2425,3700 2520,3605 v1(2520,3590)
NetD6_1: D6.1 R26.2
  other v1: 2605,4029
NetD7_1: D7.1 R27.2 | length 10
  Bottom Layer w10: v1(1585,4540) R27.2@1595,4540
NetD8_1: D8.1 R28.2 | length 60
  Top Layer w10: R28.2@2600,4600 D8.1
NetHCPL1_2: HCPL1.2 R11.1 | length 191.5
  Top Layer w10: R11.1 1605,3735 1615,3725 HCPL1.2
NetHCPL1_3: HCPL1.3 R13.1 | length 195.1
  Top Layer w10: R13.1@1585,3635 1600,3635 1642.5,3677.5 HCPL1.3@1762.5,3677.5
NetHIP1_5: HIP1.5 R8.2 | length 110.2
  Top Layer w10: HIP1.5 2330,4186 R8.2
NetHIP1_10: HIP1.10 R2.2 | length 1042.4
  Top Layer w10: v1(2040,4340) 2064,4316 2064,4301.3 2080,4285.3 v1(2080,4255) ; R2.2 2070,4065 2115,4110 2095,4130 v1(2095,4155) ; v1(2095,4440) 2095,4520 2165,4590 2242.67,4590 2243.1,4589.58 2288.02,4589.58 2302.44,4604 2426,4604 2426,4479 HIP1.10
  Bottom Layer w10: v1(2040,4340) 2055,4340 2095,4380 v1(2095,4440) ; v1(2080,4255) 2080,4224.7 2079,4223.7 2079,4206.3 2080,4205.3 2080,4185 2095,4170 2095,4160 v1@2097.5,4157.5 ; v1(2095,4155) v1@2100,4155
NetHIP1_13: HIP1.13 R7.2 | length 786.7
  Top Layer w10: R7.2 2080,3985 2146,4051 2146,4139 2110,4175 2110,4205 v1(2100,4215) ; v1(2210,4535) 2220.53,4535 2280,4475.53 HIP1.13
  Bottom Layer w10: v1(2100,4215) 2101,4216 2101,4263.7 2100,4264.7 2100,4280 2161,4341 2161,4423.7 2160,4424.7 2160,4490 2205,4535 v1(2210,4535)
NetHIP1_14: HIP1.14 R4.1 | length 507.1
  Top Layer w10: v1(2048.75,4278.75) 2027,4257 1989.44,4257 1983,4250.56 1983,4240.67 1980,4237.67 1980,4205 R4.1 ; v1(2135,4385) 2140.05,4385 2163.05,4408 2163.53,4408 2230,4474.47 HIP1.14 HIP1.14@2230,4475.53
  Bottom Layer w10: v1(2048.75,4278.75) 2063.75,4278.75 2135,4350 v1(2135,4385)
NetHIP1_16: HIP1.16 R1.1 | length 75
  Bottom Layer w10: R1.1 v1(2130,4471)
NetLS1_2: LS1.2 Q1.3 | length 195.4
  Bottom Layer w10: LS1.2 2095,3220 2133.85,3258.85 2133.85,3288.15 Q1.3
NetMOS1_1: MOS1.1 R2.1 | length 341.3
  Top Layer w10: v1(1935,3950) 1937.37,3950 1940,3947.37 1961,3968.37 1961,4032 v1(1994,4065)
  Bottom Layer w10: MOS1.1@1785,4045 1825,4005 1890,4005 1935,3960 v1(1935,3950)
NetMOS2_1: MOS2.1 R1.2 | length 287.4
  Bottom Layer w10: MOS2.1 1790,4380 2035,4380 R1.2
NetMOS3_1: MOS3.1 R7.1 | length 268.2
  Top Layer w10: MOS3.1@1785,3870 1900,3870 1939,3909 2030,3909 R7.1
NetMOS4_1: MOS4.1 R4.2 | length 416
  Top Layer w10: v1(1745,4125) 1745,4160 1790,4205 1785,4210 MOS4.1@1775,4200 ; R4.2 1985,4141 v1(1985,4170)
  Bottom Layer w10: v1(1745,4125) 1940,4125 v1(1985,4170)
NetP6_1: P6.1 R25.2 | length 115.7
  Top Layer w10: P6.1 1585,3405 R25.2@1585,3450
NetQ1_1: Q1.1 R20.2 | length 106.3
  Bottom Layer w10: R20.2 1925,3285 1933,3277 Q1.1
NetR17_1: R17.1 R18.2 TPS1.4 | length 75.3
  Bottom Layer w10: TPS1.4 1950,4426 v1(1950,4420)
NRST: *1.7 C16.2 P5.5 R16.1 S1.1 | length 1416.3
  Top Layer w10: v1(2055,3830) 2058.11,3833.11 *1.7
  Bottom Layer w10: v1(1670,3190) 1735,3190 1750,3175 2095,3175 2222,3302 C16.2 2160,3388 R16.1 2140,3385 2035,3385 2005,3415 2005,3520 2066,3581 2066,3793.7 2055,3804.7 v1(2055,3830)
OLEDRESET: *1.24
OSC32_IN: *1.3
OSC32_OUT: *1.4
OSCIN: *1.5 C2.2 R5.2 XT1.2 | length 547.2
  Top Layer w10: v1(2005,3870) 2007.48,3872.48 *1.5 2162.52,3872.48 2190,3845 v1(2190,3780)
  Bottom Layer w10: XT1.2@1970,3775 2004,3809 2004,3821.3 1999,3826.3 1999,3843.7 2010.15,3854.85 1990,3875 1990,3879 1985,3884 1985,3953.33 2030,3998.33 C2.2 ; v1@1995,3870 v1(2005,3870)
OSCOUT: *1.6 C4.2 R5.1 XT1.1 | length 809.5
  Top Layer w10: v1(2020,3835) 2036,3851 2063.7,3851 2064.59,3850.11 2107.32,3850.11 *1.6
  Bottom Layer w10: XT1.1@1972.5,3602.5 2020,3650 v1(2020,3835) 2036,3851 2134,3851 2150,3835 2150,3760 2160,3750 2231,3750 R5.1 2274,3767 C4.2
PA2: *1.16
PA3: *1.17
PA4: *1.20
PA5: *1.21
PA8: *1.41
PA13: *1.46 P5.2 R3.1 | length 1189.9
  Top Layer w10: R3.1 2309.7,3405 2346,3368.7 2346,3364 2396,3314 2466,3314 2485,3295 P5.2@2485,3275 ; P5.2@2485,3240 P5.2@2485,3275 ; *1.46 2511.85,3911.85 2485,3885 2485,3665 2591,3559 2591,3459 2610,3440 v1(2610,3360) ; v1(2640,3295) 2505,3295 P5.2@2485,3275
  Bottom Layer w10: v1(2610,3360) 2610,3320 2635,3295 v1(2640,3295)
PA14: *1.49 P5.3 R6.2 | length 1630.6
  Top Layer w10: *1.49@2485,4030 2485,4026.22 2515.61,3995.61 2515,3995 v1(2720,3995) ; v1(2620,3470) 2622.5,3472.5 2638.54,3472.5 2651.04,3485 2690,3485 v1(2710,3465)
  Bottom Layer w10: P5.3@2385,3255 2375,3265 2375,3320 2355,3340 2355,3465 2366,3476 R6.2 2441,3440 2535,3440 2570,3475 2575,3470 v1(2620,3470) ; v1(2710,3465) 2805,3465 2840,3500 2840,3600 2840,3972.7 2813.7,3999 2724,3999 v1(2720,3995)
PA15: *1.50
PB0: *1.26
PB1: *1.27
PB3: *1.55
PB4: *1.56
PB5: *1.57
PB8: *1.61
PB12: *1.33 D4.2 | length 170.8
  Top Layer w10: *1.33 2560,3625 2632,3553 D4.2
PB13: *1.34
PB14: *1.35
PC1: *1.9
PC2: *1.10
PC3: *1.11
PC5: *1.25
PC6: *1.37
PC9: *1.40
PC10: *1.51
PC11: *1.52
PC12: *1.53
PC13: *1.2
PD2: *1.54
PGND: 1.2 C6.1 C10.1 C13.1 C14.1 C15.2 C18.1 C20.1 C23.2 C24.1 CV1.2 CV2.2 D5.1 D6.2 D7.2 D8.2 HIP1.6 LS2.7 LS2.11 LS2.12 LS2.13 P2.6 P4.2 P4.8 Q1.2 R8.1 R15.1 R18.1 R24.1 R30.1 Ri1.2 TPS1.6 TPS1.9 | length 8667
  Top Layer w10: P4.8 1229.17,3600.83 1303,3527 C10.1 ; P4.2 1222.09,4522.09 1285,4585 v1(1485,4585) 1518,4552 1518,4537 1580,4475 Ri1.2 1685,4505 1730,4550 v1(1800,4550) 1800,4655 CV2.2 ; v1(1570,4605) 1609,4644 1744,4644 1785,4685 CV2.2 ; v1(1935,4255) 1957.5,4277.5 1955,4280 v1(1955,4300) ; v1(2013,3353) 2026,3340 2050.3,3340 2051.3,3341 2068.7,3341 2070.7,3339 2331,3339 2369.09,3300.91 2368.18,3300 2387.37,3300 2389.37,3298 2392.91,3298 2400.91,3290 v1(2420,3290) ; CV1.2 2120,4690 2070,4740 1885,4740 CV2.2 ; v1(2260,4620) 2289,4620 2310,4641 C6.1 ; v1(2345,4100) 2345,4123.44 2372,4150.44 2372,4204.63 2380,4212.63 HIP1.6 ; v1(2380,3985) v1(2450,3985) ; v1(2415,4405) 2433,4423 2572,4423 v1(2620,4471) ; R24.1 2439,4094 2480,4135 2550.28,4135 ; v1(2555,4160) 2555,4139.72 2550.28,4135 ; v1(2557,4331) 2565,4323 v1(2565,4240) ; v1(2600,4665) 2605,4660 D8.2 ; v1(2665,3955) 2690,3930 v1(2690,3910) ; D6.2 D6.2@2671,4035 ; v1(2680,3689) 2764,3689 v1@2792.5,3717.5 ; C14.1 2657.56,4172 2620.56,4135 2550.28,4135 ; v1(2795,3725) 2895,3725 2935,3685 3000,3685 3035,3650 3035,3505 P2.6@2955,3425
  Bottom Layer w10: P4.8 1219.17,3600.83 1420,3400 1655,3400 1730,3325 1985,3325 v1(2013,3353) ; C13.1@1489,4588 1506,4605 v1(1570,4605) ; TPS1.6 1726,4550 v1(1800,4550) ; v1(1935,4255) 1970,4255 2025,4200 2025,4145 2045,4125 2135,4125 2155,4105 ; R18.1 1960,4340 1955,4335 v1(1955,4300) ; LS2.7 2155,4229.06 2155,4105 ; v1(2260,4620) 2255,4620 CV1.2 2237.5,4690 2315,4767.5 2315,4770 2330,4785 2524,4785 2540,4769 2540,4745 2560,4725 2560,4706.53 2600,4666.53 v1(2600,4665) ; LS2.11 LS2.12 LS2.13 2440,4430 v1(2415,4405) ; v1(2380,3985) 2380,4050 v1(2420,4090) 2410,4100 v1(2345,4100) 2345,4075 2315,4045 2215,4045 2155,4105 ; v1(2420,3290) 2450,3290 2489,3329 2489,3399 v1(2495,3405) 2540,3405 2560,3425 2612.37,3425 2668.63,3481.25 2668.63,3502.03 2651,3519.66 2651,3600.34 2680,3629.34 v1(2680,3689) C23.2 ; v1(2450,3985) 2575,3985 2584,3976 2631.63,3976 2652.63,3955 v1(2665,3955) v1(2665,4030) ; v1(2555,4160) 2590,4195 2591.96,4195 1.2@2604.96,4208 ; v1(2557,4331) 2580,4354 2580,4370 2620,4410 v1(2620,4471) v1@2620,4477.63 ; v1(2565,4240) 2597,4208 1.2@2604.96,4208 ; 1.2 1.2@2604.96,4208 ; v1(2690,3910) 2690,3865 2795,3760 v1(2795,3725)
PWM2A: *1.38 P1.4 | length 361
  Top Layer w10: *1.38 2595.63,3754.37 2614,3736 2614,3666 2755,3525 P1.4@2785,3525
PWM2B: *1.39 P1.5 | length 319
  Top Layer w10: *1.39 2600.94,3774.06 2630,3745 2630,3690 2695,3625 P1.5@2785,3625
PWMA: *1.58 LS2.2 | length 357.2
  Top Layer w10: *1.58 2305.47,4053.94 2318.27,4066.73 2366.73,4066.73 2388,4088 2388,4198 2400,4210 v1(2450,4210)
  Bottom Layer w10: LS2.2 2440,4220 v1(2450,4210)
PWMAIN: HIP1.4 LS2.3 | length 239.9
  Top Layer w10: HIP1.4 2290,4285 v1(2290,4325)
  Bottom Layer w10: v1(2290,4325) 2320,4355 2360,4355 2390,4325 LS2.3
PWMB: *1.59 LS2.5 | length 384.2
  Top Layer w10: *1.59 2285.79,4060.79 2306,4081 2306,4302 v1(2325,4321)
  Bottom Layer w10: LS2.5 2285,4269.06 2311.09,4295.15 2311.09,4307.09 v1(2325,4321)
PWMBIN: HIP1.3 LS2.6 | length 15.1
  Bottom Layer w10: v1(2230,4275) 2230,4274.06 LS2.6
RING: *1.8 R20.1 | length 559.1
  Top Layer w10: v1(2045,3740) 2045,3785 2073.43,3813.43 *1.8
  Bottom Layer w10: R20.1@1920,3360 1927,3367 ; 1927.78,3367 1939,3378.22 1939,3489 2020,3570 2030,3570 2045,3585 v1(2045,3740)
RXD: *1.43 P3.5 | length 1445
  Top Layer w10: *1.43 2585.36,3852.8 2646,3792.15 2646,3734 2660,3720 2725,3720 2785,3780 2795.91,3780 2895,3879.09 2895,3940 2945,3990 3005.91,3990 3030,4014.09 3030,4635 P3.5@2953.96,4711.04
S_A: P4.6 R11.2 | length 423.3
  Top Layer w30: P4.6 1242.09,3907.91 1415,3735 R11.2
S_B: P4.7 R13.2 | length 401.1
  Top Layer w30: P4.7 1255.63,3754.37 1375,3635 R13.2
SDI: *1.23 P1.1 | length 874.7
  Top Layer w10: *1.23 2305.47,3553.23 2318.12,3540.58 2324.42,3540.58 2361,3504 2361,3398.95 2378,3381.95 2378,3377.25 2400.13,3355.13 2519.87,3355.13 2541,3334 2749,3334 2780,3365 2820,3365 2840,3345 2840,3270 P1.1@2795,3225
SPEED2_A: *1.22 P1.2 | length 700.5
  Top Layer w10: *1.22 2285.79,3549.21 2345,3490 2345,3392.33 2362,3375.33 2362,3370.63 2402.63,3330 2500,3330 2515,3315 2625.3,3315 2626.3,3316 2648.7,3316 2649.7,3315 2785,3315 P1.2@2795,3325
SPEED_A: *1.14 HCPL1.7 R12.2 | length 296.9
  Top Layer w10: v1(1830,3714) 1841,3725 HCPL1.7 1992,3698 2107.31,3698 *1.14
SPEED_B: *1.15 HCPL1.6 R14.2 | length 290.6
  Top Layer w10: v1(1830,3650) 1855,3675 HCPL1.6 2109.37,3675 *1.15
TXD: *1.42 P3.4 | length 1120.1
  Top Layer w10: v1(2515,3880) 2515,3852.75 2531.96,3835.8 2539.2,3835.8 2541.89,3833.11 *1.42 ; v1(2765,3970) v1@2772.4,3970 ; v1@2773.09,3969.31 2771.4,3971 2797,3971 2831,4005 2831,4199.3 2829,4201.3 2829,4218.7 2831,4220.7 2831,4436 2940,4545 P3.4@2950,4545
  Bottom Layer w10: 2510,3948 2523,3935 2550,3935 2575,3960 2625,3960 2651,3934 2729,3934 v1(2765,3970) ; v1(2515,3880) 2515,3943
VI: MOS3.3 MOS4.3 R31.1 Ri1.1 | length 1247.5
  Top Layer w10: Ri1.1 1940,4475 2095,4630 2226.16,4630 2256.16,4660 2287.44,4660 2289.44,4662 2330.56,4662 2332.56,4660 R31.1
  Top Layer w20: MOS3.3@1795,4045 MOS3.3@1815,4065
  Top Layer w80: Ri1.1 1785,4446 1785,4395 1875,4305 1875,4150.8 1798.2,4074 1789,4074 1785,4070 MOS3.3
VIN: C13.2 CV1.1 CV2.1 MOS1.4 MOS2.4 P4.1 R27.1 TPS1.7 | length 2373.4
  Bottom Layer w10: MOS2.4 1490,4335 C13.2 C13.2@1495,4515 ; R27.1 1539,4515 C13.2@1495,4515 ; TPS1.7 1555,4575 C13.2@1495,4515
  Bottom Layer w30: P4.1@1160.06,4659.94 1473.16,4659.94 1478.21,4665 1565.91,4665 ; 1565,4670 1665,4670 1755,4760 1940,4760 CV1.1
  Bottom Layer w80: P4.1@1160.06,4659.94 1535,4285 1535,3985 MOS1.4@1565,3955
pads on no net: *2.6 *2.7 *2.8 P2.2 P2.4 P2.5 TJA1.5 TPS1.2 TPS1.3 TPS1.5 U1.4

## Polygon pours and split planes (outlines as drawn)
PGND on Top Layer "Top Layer-PGND" (solid, remove dead copper, pour order 222): 750,2985 840,3075 3475,3075 3475,4830 3260,5045 3175,4960 885,4960
GND on Top Layer "Top Layer-GND" (solid, remove dead copper, pour order 218): 1570,3245 1595,3220 2440,3220 2440,3420 2465,3445 2470,3440 2650,3440 2650,4270 2575,4195 1965,4195 1965,3950 1725,3710 1575,3710
PGND on Bottom Layer "Bottom Layer-PGND" (solid, remove dead copper, pour order 224): 825,2955 3445,2955 3335,3065 3335,5065 745,5065 670,4990
GND on Bottom Layer "Bottom Layer-GND" (solid, remove dead copper, pour order 220): 1560,3235 2405,3235 2410,3230 2465,3285 2465,3440 2635,3440 2695,3500 2695,4320 2030,4320 1885,4175 1885,3915 1835,3915 1550,3630

## Keep-outs
Keep-Out Layer:
  lines w10: 1090,4765 cw(c1142.5,4767.5) 1140,4820 3015,4820 cw(c3012.5,4772.5) 3060,4770 3060,3189.33 cw(c3005.34,3189.66) 3005,3135 1141.2,3140.07 cw(c1148,3198.08) 1090,3204.88 1090,4775

## Other copper
Top Layer:
  pour cut-out: 1850,3905 1814.87,3869.87 1814.87,3708.04 1793.04,3708.04 1670,3585 1635,3620 1635,3715 1670,3750
  pour cut-out: 2219.66,3611.82 2219.66,3651.48 2231.52,3639.62 2231.52,3617.52 2229.42,3615.42
  pour cut-out: 2208,3497 2220.52,3497 2220.52,3546.09 2215.43,3551.18 2215.43,3552.9 2211.71,3549.19
  pour cut-out: 2220.39,3545.35 2220.39,3547.94 2215.43,3552.9 2208,3545.47 2208,3497 2220.52,3497
Bottom Layer:
  pour cut-out: 1710,3615 1900.46,3805.46 1900.46,3833.69 1796.31,3833.69 1765,3865 1675,3775 1675,3745
  pour cut-out: 2165,4200 2170,4205 2365,4205 2365,4236.81 2316.81,4285 2313.22,4281.41 2208.16,4281.41
  pour cut-out: 1678.48,3626.52 1705,3600 1705,3520 1655,3520 1650,3525 1655,3560

## Silkscreen, mask and mechanical layers (free items; w line width, h text height)
Top Overlay:
  text "VIN" at 1275,4710 h30 r270
  text "RXD" at 2810,4680 h30 r90
  text "PGND" at 1275,4590 h30 r270
  text "TXD" at 2810,4515 h30 r90
  text "MOT+" at 1275,4420 h30 r270
  text "GND" at 2810,4370 h30 r90
  text "MOT-" at 1275,4255 h30 r270
  text "3.3V" at 2810,4215 h30 r90
  text "5V" at 1275,4080 h30 r270
  text "5V" at 2810,4065 h30 r90
  text "S_A" at 1280,3950 h30 r270
  text "12V" at 3040,3895 h30 r90
  text "S_B" at 1280,3790 h30 r270
  text "5V" at 3035,3705 h30 r90
  text "PGND" at 1275,3640 h30 r270
  text "P2B" at 2885,3585 h30 r90
  text "C_H" at 1280,3485 h30 r270
  text "P2A" at 2885,3480 h30 r90
  text "DI2" at 2885,3390 h30 r90
  text "PGND" at 3025,3380 h30 r90
  text "C_L" at 1280,3325 h30 r270
  text "6_1" at 1510,3300 h30
  text "S2A" at 2885,3290 h30 r90
  text "1_2" at 1960,3275 h30
  text "5V" at 1800,3270 h30
  text "SDI" at 2885,3195 h30 r90
  text "NRS" at 2140,3160 h30
  text "GND" at 2240,3160 h30
  text "A14" at 2355,3160 h30
  text "A13" at 2450,3160 h30
  text "3V3" at 2540,3160 h30
Bottom Overlay:
  text "RXD" at 2820,4750 h30 r90
  text "VIN" at 1275,4635 h30 r270
  text "TXD" at 2820,4595 h30 r90
  text "PGND" at 1275,4485 h30 r270
  text "GND" at 2820,4455 h30 r90
  text "MOT+" at 1275,4305 h30 r270
  text "3.3V" at 2820,4305 h30 r90
  text "MOT-" at 1275,4145 h30 r270
  text "5V" at 2820,4110 h30 r90
  text "5V" at 1275,4030 h30 r270
  text "12V" at 3040,3965 h30 r90
  text "S_A" at 1280,3870 h30 r270
  text "5V" at 3040,3755 h30 r90
  text "S_B" at 1280,3705 h30 r270
  text "P2B" at 2885,3675 h30 r90
  text "P2A" at 2885,3565 h30 r90
  text "PGND" at 1275,3530 h30 r270
  text "PGND" at 3040,3495 h30 r90
  text "DI2" at 2885,3465 h30 r90
  text "C_H" at 1280,3400 h30 r270
  text "S2A" at 2885,3355 h30 r90
  text "C_L" at 1280,3250 h30 r270
  text "SDI" at 2885,3230 h30 r90
  text "GND" at 2240,3185 h30 r180
  text "NRS" at 2225,3155.01 h30
  text "A14" at 2425,3155.01 h30
  text "A13" at 2525,3155.01 h30
  text "3V3" at 2620,3155.01 h30
Top Solder:
  lines w10: 1496.46,3930 1520,3930 ; 1510,4380 1605,4285 ; 1795,4385 1795,4440 ; 1230,4290 1230,4293.54 1230,4290
  lines w80: 1160,4210 1415,3955 1760,3955 ; 1160,4363.54 1230,4293.54 ; 1230,4290 1530,4290 1555,4315 ; 1476.46,3950 1490,3950 ; 1605,4285 1771.25,4285 ; 1755,4480 1795,4440 ; 1775,4055 1875,4155 1875,4305 1795,4385
Bottom Solder:
  lines w80: 1159.37,4680 1149.68,4670.31 1450,4370 1600,4370 ; 1535,4380 1535,4080 1565,4050 ; 1765,3875 1765,3955 ; 1771.25,4213.75 1771.25,4285